# Altium PCB VDMEDA_Arduino.PcbDoc
Units mil, origin at the board's own origin, x right, y up, seen from the top; angles counter-clockwise.
Board outline 6000 x 4000 mil, 2 copper layers (Top Layer, Bottom Layer); 23 components, 20 nets, 88 pads, 6 vias.
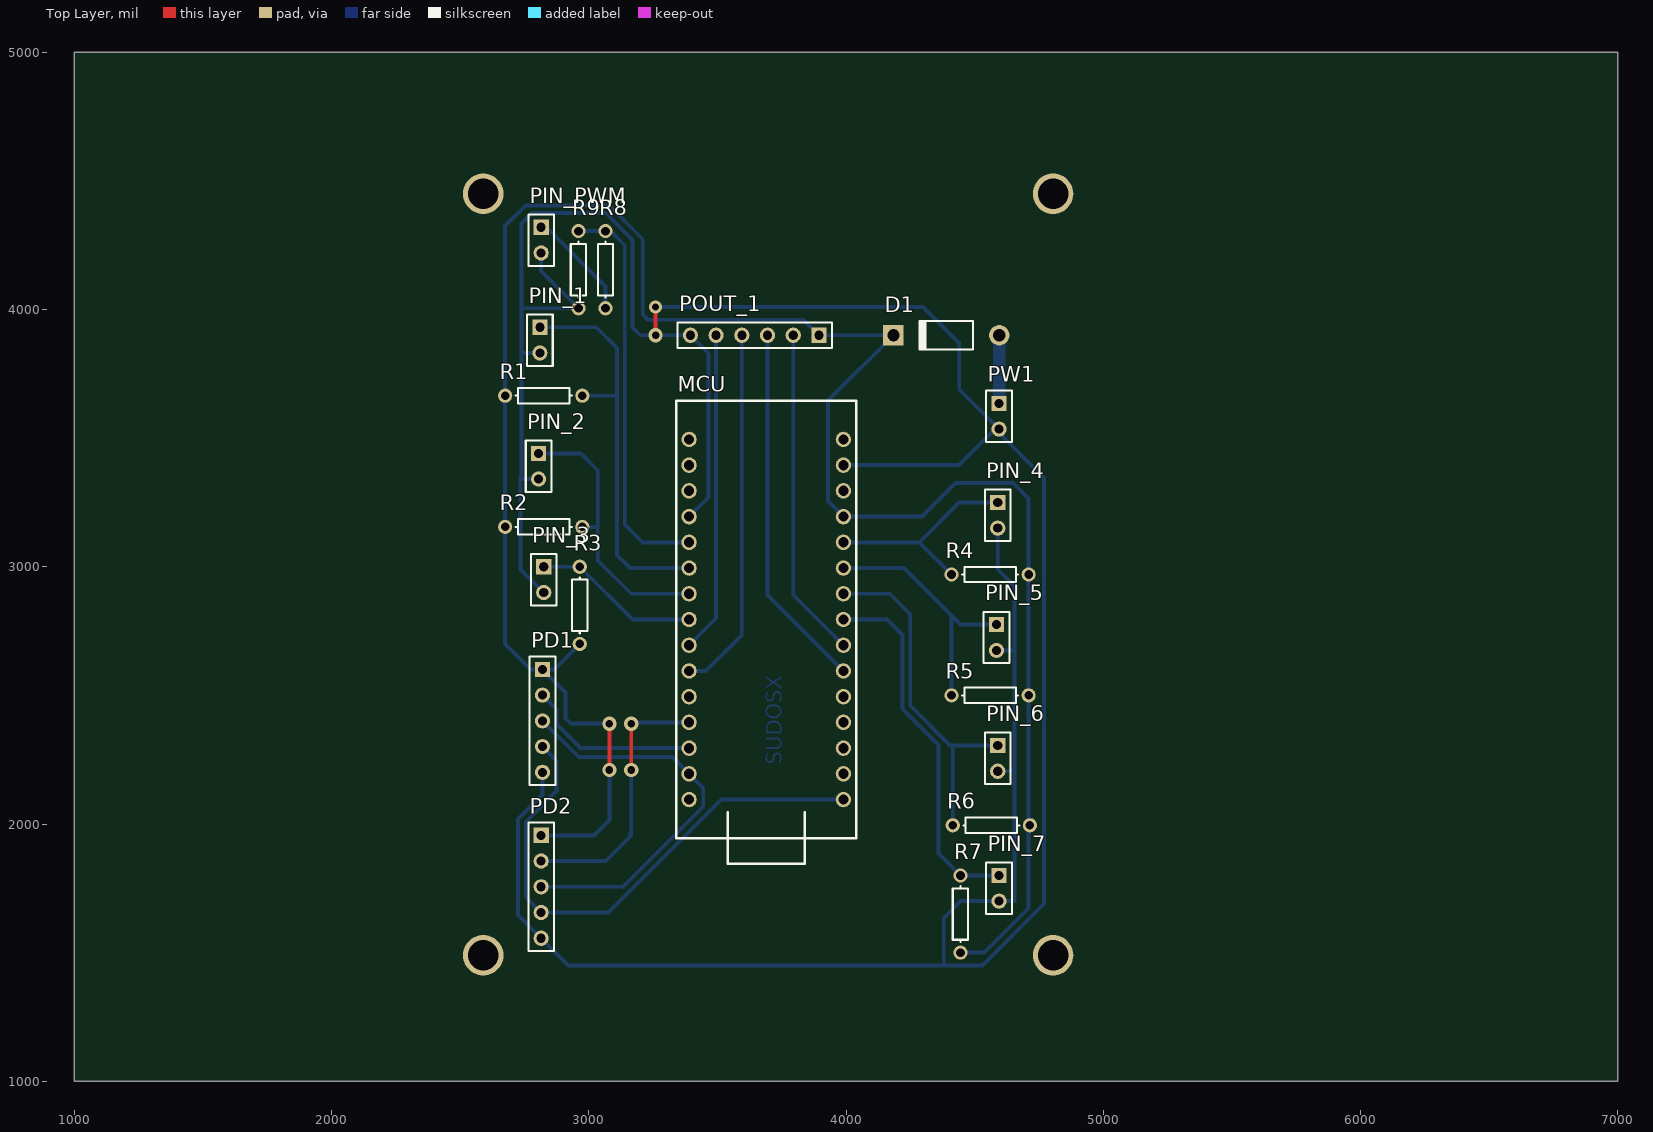
[diagram p0: Top Layer view]
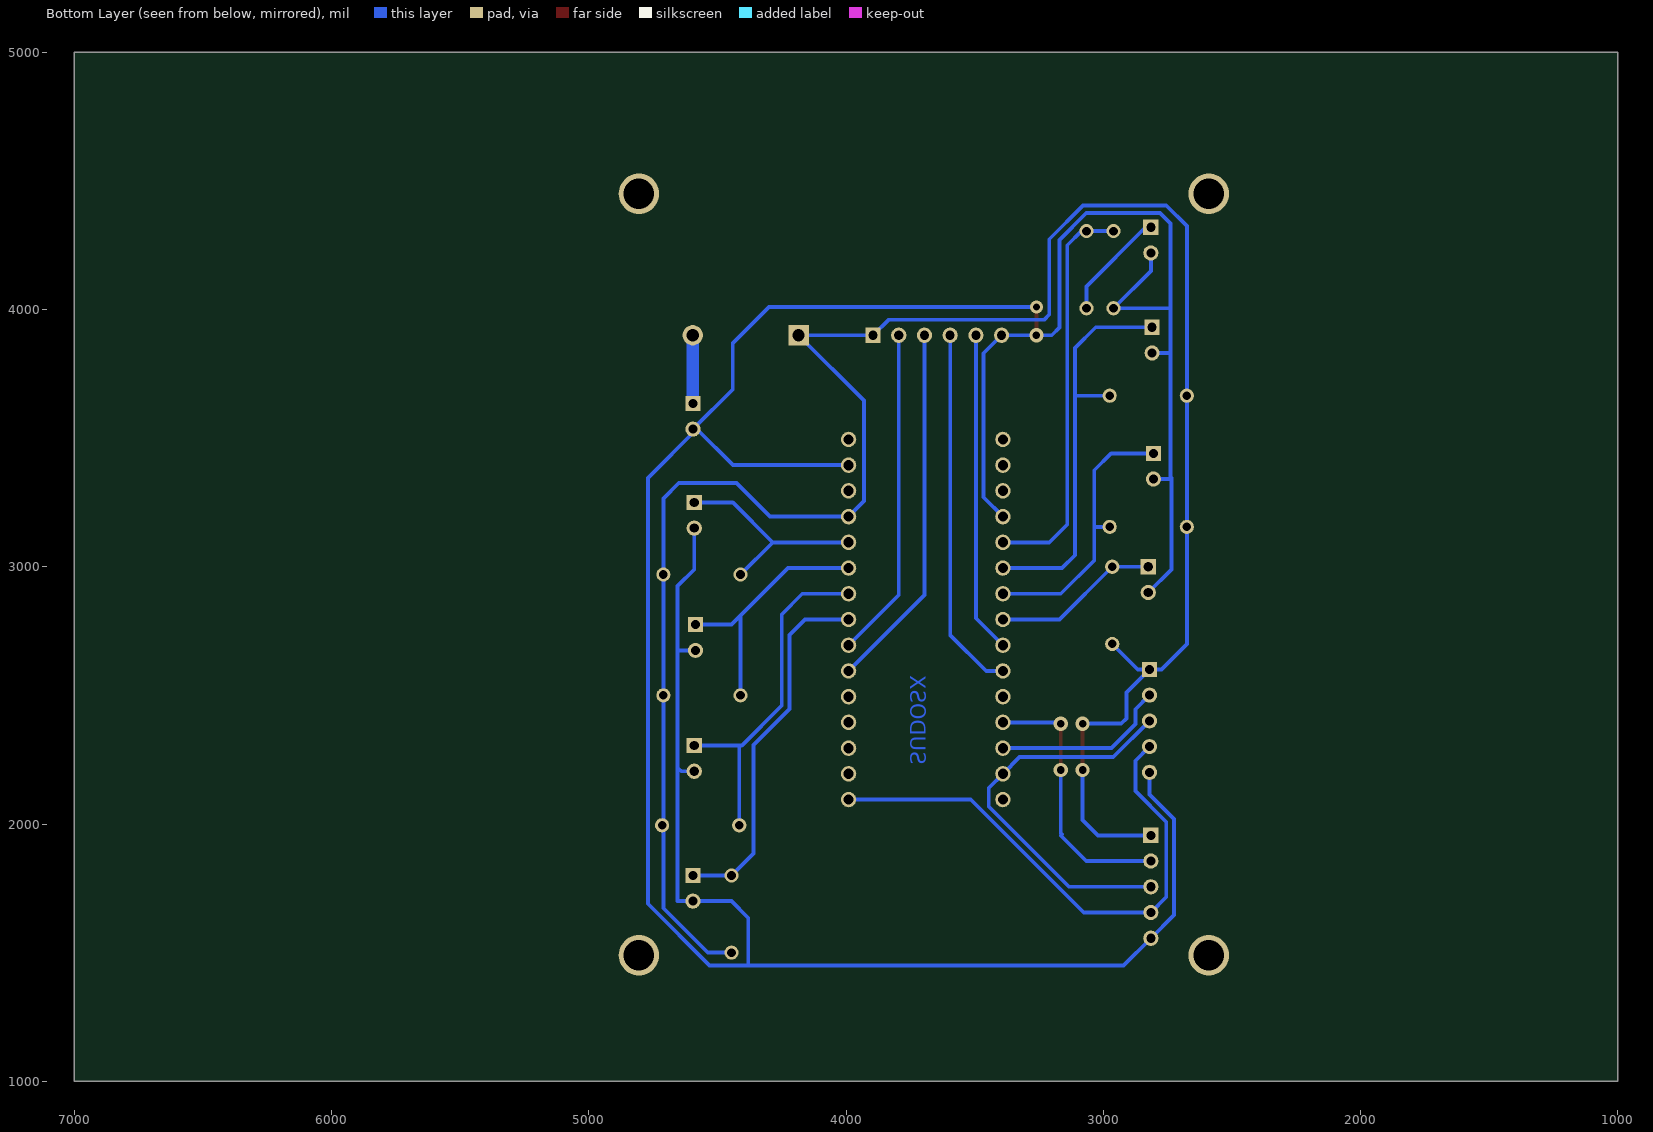
[diagram p1: Bottom Layer view, seen from below]

## Layer stack, top to bottom
Top Solder: solder mask 0.4, Solder Resist, Dk 3.5
Top Layer: signal copper 1.4
Dielectric 1: dielectric 12.6, FR-4, Dk 4.8
Bottom Layer: signal copper 1.4
Bottom Solder: solder mask 0.4, Solder Resist, Dk 3.5

## Board outline
1000,1000 7000,1000 7000,5000 1000,5000

## Design rules (kind name [scope] priority, off if disabled: settings)
Clearance [All] p1: gap=15
PolygonConnect [All] p1: connectstyle=Relief reliefconductorwidth=10 reliefentries=4 polygonreliefangle="90 Angle" airgapwidth=10
RoomDefinition VDMEDA_Arduino [InComponentClass('VDMEDA_Arduino')] p1: confinementstyle=ConfineIn formatcopy=TRUE lockcomponents=FALSE outline 2425,1355 4930,1355 4930,4595 2425,4595
RoutingTopology [All] p1: topology=Starburst
RoutingVias [All] p1: holewidth=30 width=55 viastyle="Through Hole" minholewidth=30 minwidth=55 maxholewidth=30 maxwidth=55
SolderMaskExpansion [All] p1: expansion=4
UnpouredPolygon [All] p1: allowunpoured=FALSE
Width [All] p1: maxlimit=50 minlimit=15 preferedwidth=15
28 further rules are at their usual default settings.

## Components (designator, comment, footprint, x,y, rotation, side; value= is the part's Value field where it differs from the comment)
D1 "Diode 1N4001" DO-41 4390,3900 r180 top
MCU "ARDUINO_NANO" ARDUINO_NANO_ARDUINO_NANO(Primary) 3690,2845 r0 top
PD1 "Header 5" HDR1X5 2820,2600.91 r270 top
PD2 "Header 5" HDR1X5 2815,1955.91 r270 top
PIN_1 "Header 2" HDR1X2 2810,3930.91 r270 top
PIN_2 "Header 2" HDR1X2 2805,3440.91 r270 top
PIN_3 "Header 2" HDR1X2 2825,3000 r270 top
PIN_4 "Header 2" HDR1X2 4590,3250 r270 top
PIN_5 "Header 2" HDR1X2 4585,2775 r270 top
PIN_6 "Header 2" HDR1X2 4590,2305 r270 top
PIN_7 "Header 2" HDR1X2 4595,1800 r270 top
PIN_PWM "Header 2" HDR1X2 2815,4320 r270 top
POUT_1 "Header 6" HDR1X6 3895,3900 r180 top
PW1 "Header 2" HDR1X2 4595,3635 r270 top
R1 "Res1" AXIAL-0.3 2825,3665 r180 top
R2 "Res1" AXIAL-0.3 2825,3155 r180 top
R3 "Res1" AXIAL-0.3 2965,2850 r270 top
R4 "Res1" AXIAL-0.3 4560,2970 r0 top
R5 "Res1" AXIAL-0.3 4560,2500 r0 top
R6 "Res1" AXIAL-0.3 4565,1995 r0 top
R7 "Res1" AXIAL-0.3 4445,1650 r270 top
R8 "Res1" AXIAL-0.3 3065,4155 r270 top
R9 "Res1" AXIAL-0.3 2960,4155 r90 top

## Footprints (in the part's own frame and the unit in brackets; to place one, negate y for a bottom-side part, rotate by r counter-clockwise, add the part's x,y. Pads: shape width x height; smd on the part's side, far side on the other; paste and mask are expansions set on the pad)
ARDUINO_NANO_ARDUINO_NANO(Primary) [mil]
  round 60 hole 40 mask-1000: 3.3V(300,-650) 5V(300,350) A0(300,250) A1(300,150) A2(300,50) A3(300,-50) A4(300,-150) A5(300,-250) A6(300,-350) A7(300,-450) AREF(300,-550) D2(-300,250) D3(-300,150) D4(-300,50) D5(-300,-50) D6(-300,-150) D7(-300,-250) D8(-300,-350) D9(-300,-450) D10(-300,-550) D11(-300,-650) D12(-300,-750) D13(300,-750) GND(-300,350) GND(300,550) RESET(-300,450) RESET(300,450) RX(-300,550) TX(-300,650) VIN(300,650)
  silkscreen extent -350,-1000 350,800
AXIAL-0.3 [mm] "Axial Device, Thru-Hole; 2 Leads; 0.3 in Pin Spacing"
  round 1.4 hole 0.85: 1(-3.81,0) 2(3.81,0)
  silkscreen extent -2.77,-0.76 2.77,0.76
DO-41 [mm] "Diode, Axial; Body 5.2 x 2.7 mm (LxDia. max), Lead Dia. 0.86 mm (max)"
  round 2 hole 1.2: 1(-5.23,0)
  rect 2x2 hole 1.2: 2(5.23,0)
  silkscreen extent -2.65,-1.4 2.75,1.4
HDR1X2 [mm] "Connector; Header; 2 Position"
  rect 1.5x1.5 hole 0.9: 1(0,0)
  round 1.5 hole 0.9: 2(2.54,0)
  silkscreen extent -1.27,-1.27 3.81,1.27
HDR1X5 [mm] "Connector; Header; 5 Position"
  rect 1.5x1.5 hole 0.9: 1(0,0)
  round 1.5 hole 0.9: 2(2.54,0) 3(5.08,0) 4(7.62,0) 5(10.16,0)
  silkscreen extent -1.27,-1.27 11.43,1.27
HDR1X6 [mm] "Connector; Header; 6 Position"
  rect 1.5x1.5 hole 0.9: 1(0,0)
  round 1.5 hole 0.9: 2(2.54,0) 3(5.08,0) 4(7.62,0) 5(10.16,0) 6(12.7,0)
  silkscreen extent -1.27,-1.27 13.97,1.27

## Part data
D1: "1 Amp General Purpose Rectifier"
PD1 PD2: "Header, 5-Pin"
PIN_1 PIN_2 PIN_3 PIN_4 PIN_5 PIN_6 PIN_7 PIN_PWM PW1: "Header, 2-Pin"
POUT_1: "Header, 6-Pin"
R1 R2 R3 R4 R5 R6 R7 R8 R9: "Resistor"

## Free pads (board coordinates)
  round 157.48 hole 118.11: -(2590,1490) -(2590,4450) -(4805,1490) -(4805,4450)

## Via types
v1: diameter 55, hole 30, Top Layer to Bottom Layer, 5 vias
v2: diameter 50, hole 28, Top Layer to Bottom Layer, 1 vias

## Nets (pads, with @x,y where several pads share a name; then routed paths per layer and width w, separated by ;. In a path a pad name is that pad's centre, name@x,y a point inside that pad or via, vN(x,y) a via of type N, cw(c..) or ccw(c..) an arc to the next point about the centre after c; other vN are vias at no path point)
5V: D1.2 MCU.5V PD1.1 PD2.1 POUT_1.1 R1.2 R2.2 R3.2 R4.2 R5.2 R6.2 R7.2 | length 8554
  Top Layer w15: v1(3080,2210) v1(3080,2390)
  Bottom Layer w15: PD2.1 3020.91,1955.91 3080,2015 v1(3080,2210) ; R3.2 2865.91,2600.91 PD1.1 ; v1(3080,2390) 2930,2390 2910,2410 2910,2510.91 PD1.1 ; R7.2 4537.57,1500 4710,1672.43 R5.2 R4.2 4710,3265 4650,3325 4425,3325 4295,3195 MCU.5V 3930,3255 3930,3645.91 D1.2 POUT_1.1 3835,3960 3230,3960 3210,3980 3210,4273.22 3078.22,4405 2755,4405 2675,4325 R1.2 R2.2 2675,2700 2774.09,2600.91 PD1.1
GND: MCU.GND PD1.5 PD2.5 PIN_1.2 PIN_2.2 PIN_3.2 PIN_4.2 PIN_5.2 PIN_6.2 PIN_7.2 PIN_PWM.2 POUT_1.6 PW1.2 R9.1 | length 13173.1
  Top Layer w15: v1(3260,3900) v2(3260,4010)
  Bottom Layer w15: 2735,3345 2735,2990 PIN_3.2 ; 2740,3830.91 PIN_1.2 ; 2740,4005 R9.1 2815,4150 PIN_PWM.2 ; PIN_2.2 2739.09,3340.91 2739.09,4334.97 2779.12,4375 3065.79,4375 3170,4270.79 3170,3930 3200,3900 v1(3260,3900) POUT_1.6 3465,3830 3465,3270 MCU.GND@3390,3195 ; PD1.5 2820,2115 2725,2020 2725,1645.91 PD2.5 2920.97,1449.94 4380,1449.94 ; v2(3260,4010) 4300,4010 4440,3870 4440,3690 PW1.2 ; MCU.GND@3990,3395 4440,3395 4580,3535 4770,3345 4770,1690 4530,1450 4465.79,1450 4465.74,1449.94 4380,1449.94 ; PIN_5.2 4650,2675 ; PIN_6.2 4640,2205 4650,2215 ; PIN_4.2 4590,2990 4655,2925 4655,1700 PIN_7.2 4445,1700 4380,1635 4380,1449.94
NetD1_1: D1.1 PW1.1 | length 271.6
  Bottom Layer w15: PW1.1@4580,3635 PW1.1@4595.9,3650.9
  Bottom Layer w50: PW1.1@4595.9,3650.9 D1.1
NetMCU_A0: MCU.A0 PIN_4.1 R4.1 | length 841
  Bottom Layer w15: MCU.A0 4285,3095 ; R4.1 4285,3095 ; PIN_4.1 4440,3250 4285,3095
NetMCU_A1: MCU.A1 PIN_5.1 R5.1 | length 996.1
  Bottom Layer w15: MCU.A1 4225,2995 4410,2810 ; R5.1 4410,2810 ; PIN_5.1 4445,2775 4410,2810
NetMCU_A2: MCU.A2 PIN_6.1 R6.1 | length 1364.4
  Bottom Layer w15: MCU.A2 4170,2895 4250,2815 4250,2460 4405,2305 4420,2305 ; R6.1 4415,2300 4420,2305 ; PIN_6.1 4420,2305
NetMCU_A3: MCU.A3 PIN_7.1 R7.1 | length 1433.1
  Bottom Layer w15: MCU.A3 4160,2795 4220,2735 4220,2447.57 4360,2307.57 4360,1885 R7.1 PIN_7.1
NetMCU_A4: MCU.A4 POUT_1.2 | length 1285.8
  Bottom Layer w15: POUT_1.2 3795,2890 MCU.A4
NetMCU_A5: MCU.A5 POUT_1.3 | length 1427.2
  Bottom Layer w15: POUT_1.3 3695,2890 MCU.A5
NetMCU_D2: MCU.D2 R8.1 R9.2 | length 1566.8
  Bottom Layer w15: R9.2 R8.1 3085,4305 3140,4250 3140,3165 3210,3095 MCU.D2
NetMCU_D3: MCU.D3 PIN_1.1 R1.1 | length 1574.2
  Bottom Layer w15: PIN_1.1 3029.09,3930.91 3110,3850 3110,3665 ; R1.1 3110,3665 ; MCU.D3 3160,2995 3110,3045 3110,3665
NetMCU_D4: MCU.D4 PIN_2.1 R2.1 | length 1071.1
  Bottom Layer w15: PIN_2.1 2969.09,3440.91 3035,3375 3035,3025 3165,2895 MCU.D4 ; R2.1 3030,3155
NetMCU_D5: MCU.D5 PIN_3.1 R3.1 | length 649.9
  Bottom Layer w15: PIN_3.1 R3.1 3170,2795 MCU.D5
NetMCU_D6: MCU.D6 POUT_1.5 | length 1248.5
  Bottom Layer w15: MCU.D6 3495,2800 POUT_1.5
NetMCU_D7: MCU.D7 POUT_1.4 | length 1428
  Bottom Layer w15: MCU.D7 3455,2595 3595,2735 POUT_1.4
NetMCU_D9: MCU.D9 PD2.2 | length 1055.2
  Top Layer w15: v1(3165,2210) v1(3165,2390)
  Bottom Layer w15: PD2.2 3065.91,1855.91 3165,1955 3160,1960 3165,1965 v1(3165,2210) ; v1@3165,2395 MCU.D9
NetMCU_D10: MCU.D10 PD1.2 | length 689
  Bottom Layer w15: PD1.2 2875,2445.91 2875,2388.33 2968.33,2295 MCU.D10
NetMCU_D11: MCU.D11 PD1.3 PD2.3 | length 1564.7
  Bottom Layer w15: PD2.3 3133.48,1755.91 3445,2067.43 3445,2140 MCU.D11 3325,2260 2960.91,2260 PD1.3
NetMCU_D13: MCU.D13 PD1.4 PD2.4 | length 2099.2
  Bottom Layer w15: PD1.4 2875,2245.91 2875,2127.57 2755,2007.57 2755,1715.91 PD2.4 3075.91,1655.91 3515,2095 MCU.D13
NetPIN_PWM_1: PIN_PWM.1 R8.2 | length 430.3
  Bottom Layer w15: PIN_PWM.1 2835,4320 3065,4090 R8.2
pads on no net: MCU.3.3V MCU.A6 MCU.A7 MCU.AREF MCU.D8 MCU.D12 MCU.RESET MCU.RX MCU.TX MCU.VIN

## Other copper
Bottom Layer:
  text "SUDOSX" at 3750,2230 h60 r90

## Silkscreen, mask and mechanical layers (free items; w line width, h text height)
Mechanical 1:
  lines w10: 2425,1355 2425,4595 4930,4595 4930,1355 2425,1355